# Altium PCB PCB1.PcbDoc
Units mm, origin at the board's own origin, x right, y up, seen from the top; angles counter-clockwise.
Board outline 10 x 18 mm, 4 copper layers (Top Layer, Layer 1, Layer 2, Bottom Layer), stack 0.603 mm thick; 24 components, 17 nets, 88 pads, 24 vias.
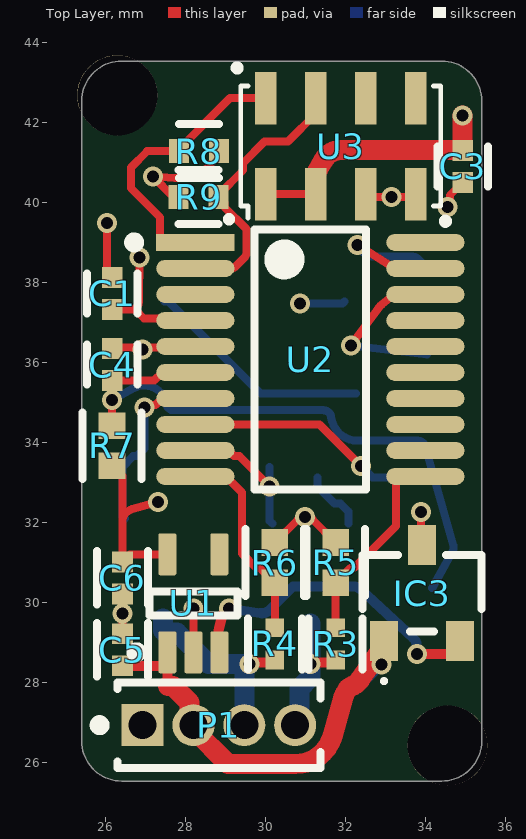
[diagram p0: Top Layer view]
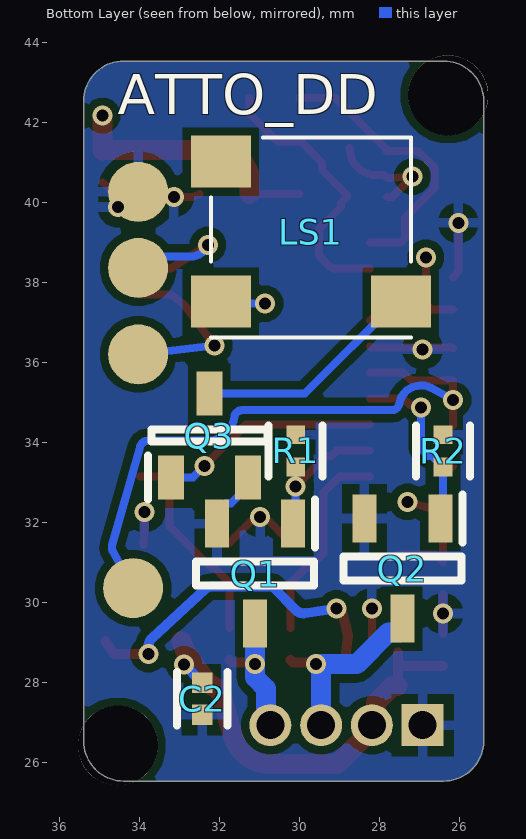
[diagram p1: Bottom Layer view, seen from below]
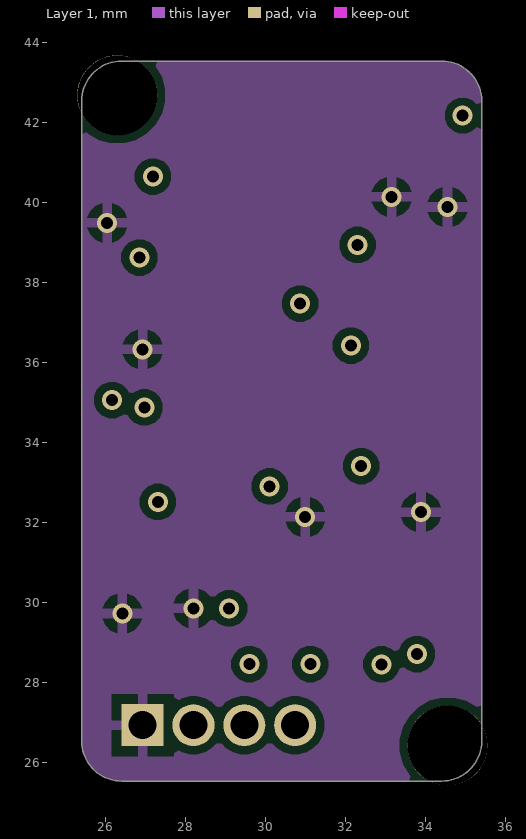
[diagram p2: Layer 1]
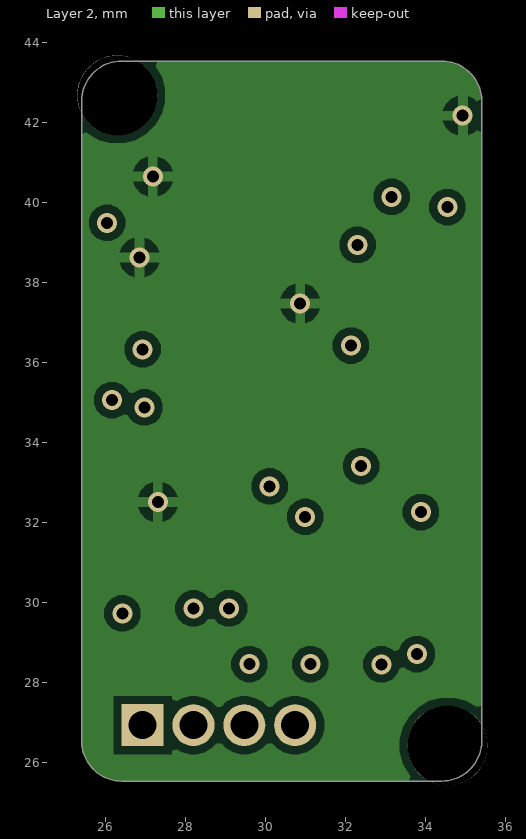
[diagram p3: Layer 2]
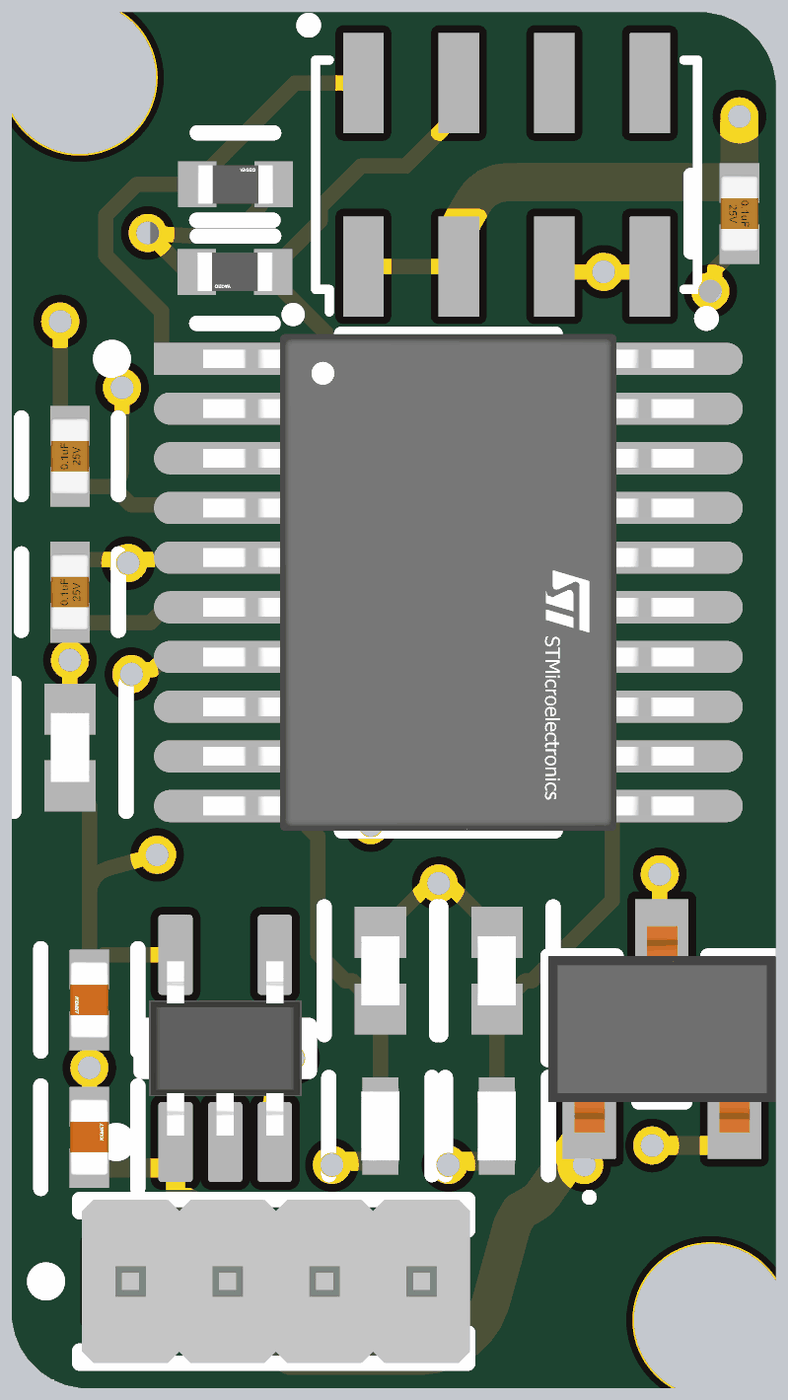
[diagram p4: 3D render of the assembled board from above, using the file's embedded part models]
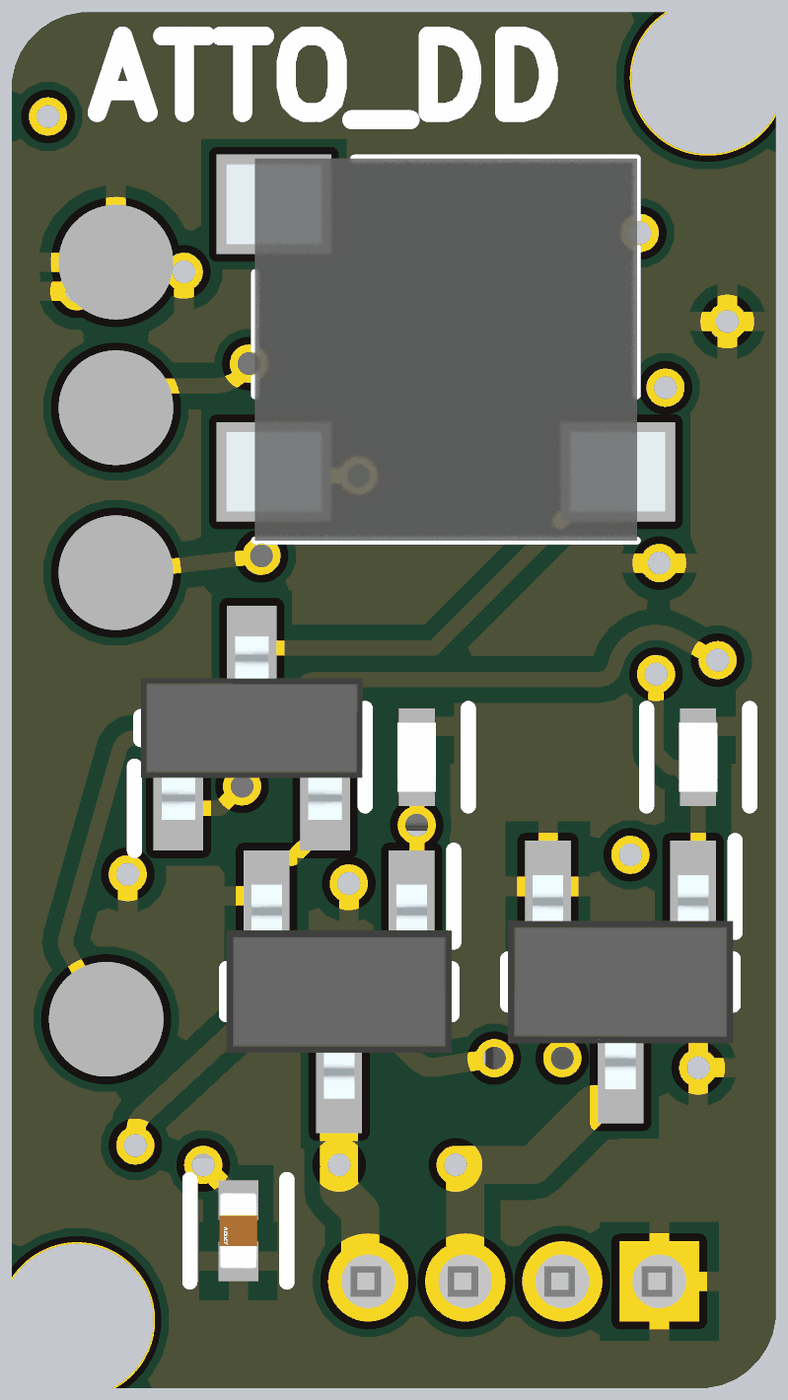
[diagram p5: 3D render of the assembled board from below, using the file's embedded part models]

## Layer stack, top to bottom
Top Solder: solder mask 0.0102, Solder Resist, Dk 3.5
Top Layer: signal copper 0.0356
Dielectric 2: prepreg 0.0711, PP-006, Dk 4.1
Layer 1: signal copper 0.035
Dielectric 1: dielectric 0.32, FR-4, Dk 4.8
Layer 2: signal copper 0.035
Dielectric 3: prepreg 0.0711, PP-006, Dk 4.1
Bottom Layer: signal copper 0.0356
Bottom Solder: solder mask 0.0102, Solder Resist, Dk 3.5

## Board outline
25.4,26.527 25.4,42.527 cw(c26.4,42.527) 26.4,43.527 34.4,43.527 cw(c34.4,42.527) 35.4,42.527 35.4,26.527 cw(c34.4,26.527) 34.4,25.527 26.4,25.527 cw(c26.4,26.527)

## Design rules (kind name [scope] priority, off if disabled: settings)
Clearance Clearance_1 [InNamedPolygon('GND_L01_P000')] p1: gap=0.254 ignorepadtopadclearanceinfootprint=FALSE
Clearance [All] p2: gap=0.2 ignorepadtopadclearanceinfootprint=TRUE
PolygonConnect PolygonConnect_2 [All vs IsNamedPolygon('GND_L01_P000')] p1: connectstyle=Relief reliefconductorwidth=0.254 reliefentries=4 polygonreliefangle="90 Angle" airgapwidth=0.254
PolygonConnect PolygonConnect_1 [All vs IsNamedPolygon('GND_L01_P000')] p2: connectstyle=Relief reliefconductorwidth=0.254 reliefentries=4 polygonreliefangle="90 Angle" airgapwidth=0.254
PolygonConnect [All] p3: connectstyle=Relief reliefconductorwidth=0.254 reliefentries=4 polygonreliefangle="90 Angle" airgapwidth=0.254
RoutingVias [All] p1: holewidth=0.3 width=0.5 viastyle="Through Hole" minholewidth=0.3 minwidth=0.5 maxholewidth=0.3 maxwidth=0.5
SolderMaskExpansion [All] p1: expansion=0.102 istentingtop=FALSE
SupplyNets "Schematic Supply Nets_2" [InNet('VBAT')] p1: voltage=0.000
SupplyNets "Schematic Supply Nets_1" [InNet('3v3')] p2: voltage=0.000
SupplyNets "Schematic Supply Nets" [InNet('GND')] p3: voltage=0.000
Width [All] p1: maxlimit=1 minlimit=0.2 preferedwidth=0.254 toplayer_maxwidth=0.5 toplayer_prefwidth=0.2 midlayer1_minwidth=0.254 midlayer2_minwidth=0.254 bottomlayer_maxwidth=0.5 bottomlayer_prefwidth=0.2 minimp=50.000000 maximp=50.000000 favimp=50.000000
30 further rules are at their usual default settings.

## Components (designator, comment, footprint, x,y, rotation, side; value= is the part's Value field where it differs from the comment)
C1 "0.1uF" FP-C0402-BB-MFG 26.162,37.719 r90 top value="0.10 μF"
C2 "C0402C105K8PACTU" FP-C0402C105K8PACTU-MFG 32.433,27.587 r270 bottom
C3 "0.1uF" FP-C0402-BB-MFG 34.925,40.894 r270 top value="0.10 μF"
C4 "0.1uF" FP-C0402-BB-MFG 26.162,35.941 r90 top value="0.10 μF"
C5 "C0402C105K8PACTU" FP-C0402C105K8PACTU-MFG 26.416,28.81 r90 top
C6 "C0402C105K8PACTU" FP-C0402C105K8PACTU-MFG 26.416,30.607 r270 top
IC3 "A1220LLHLT-T" A3213ELHLTT 33.909,30.226 r0 top
LS1 "CMT-0525-75-SMT-TR" CMT052575SMTTR 29.718,39.116 r180 bottom
P1 "GRPB041VWVN-RC" SLIN-GRPB041VWVN-RC_V 28.829,26.924 r0 top
Q1 "AO3400A" SOT95P280X125-3N 31.115,30.714 r270 bottom
Q2 "AO3400A" SOT95P280X125-3N 27.432,30.841 r270 bottom
Q3 "DDTD113ZC-7-F" SOT96P240X110-3N 32.258,34.163 r90 bottom
R1 "CRCW0402100KFKED" FP-CRCW0402-e3-IPC_C 30.099,33.782 r270 bottom
R2 "CRCW0402100KFKED" FP-CRCW0402-e3-IPC_C 26.416,33.782 r270 bottom
R3 "CRCW0402100KFKED" FP-CRCW0402-e3-IPC_C 31.75,28.956 r270 top
R4 "CRCW0402100KFKED" FP-CRCW0402-e3-IPC_C 30.226,28.956 r270 top
R5 "CRCW040250K0FKED" FP-CRCW0402-e3-IPC_A 31.75,30.988 r270 top
R6 "CRCW040250K0FKED" FP-CRCW0402-e3-IPC_A 30.226,30.988 r270 top
R7 "CRCW040250K0FKED" FP-CRCW0402-e3-IPC_A 26.162,33.909 r270 top
R8 "RC0402JR-074K7L" FP-RC0402-0_4-MFG 28.329,41.275 r0 top
R9 "RC0402JR-074K7L" FP-RC0402-0_4-MFG 28.321,40.132 r180 top
U1 "TLV70033DCKR" DCK0005A_M 28.194,29.972 r90 top
U2 "STM32G030F6P6TR" FP-TSSOP20-YA-IPC_A 31.115,36.068 r0 top
U3 "MS560702BA03-50" MS5607 31.877,41.402 r0 top

## Footprints (in the part's own frame and the unit in brackets; to place one, negate y for a bottom-side part, rotate by r counter-clockwise, add the part's x,y. Pads: shape width x height; smd on the part's side, far side on the other; paste and mask are expansions set on the pad)
A3213ELHLTT [mm]
  rect 0.7x1 smd: 1(-0.95,-1.2) 2(0.95,-1.2) 3(0,1.2)
  silkscreen extent -1.49,-2.25 1.49,0.95, body extent -1.48,-1.35 1.49,1.35, height 1.06
CMT052575SMTTR [mm]
  rect 1.5x1.3 smd: 1(-2.25,-1.6) 2(2.25,-1.6) 3(-2.25,1.9)
  silkscreen extent -2.5,-2.5 2.5,2.5, body extent -2.87,-2.5 2.87,2.5, height 2.9
DCK0005A_M [mm] "SOT23, 5-Leads, Body 2.15x1.4mm, Pitch 0.65mm, IPC Low Density"
  rrect22% 1.05x0.45 smd: 1(-1.225,0.65) 2(-1.225,0) 3(-1.225,-0.65) 4(1.225,-0.65) 5(1.225,0.65)
  silkscreen extent -1.35,-1.1 0.3,1.55, body extent -1.14,-1 1.14,1, height 0.94
FP-C0402-BB-MFG [mm]
  rect 0.52x0.52 smd paste+0 mask+0: 1(-0.4,0) 2(0.4,0)
  silkscreen extent -0.5,-0.64 0.5,0.64, body extent -0.8,-0.4 0.8,0.4, height 0.25
FP-C0402C105K8PACTU-MFG [mm]
  rect 0.52x0.52 smd paste+0 mask+0: 1(-0.4,0) 2(0.4,0)
  silkscreen extent -0.67,-0.64 0.67,0.64, body extent -0.5,-0.25 0.5,0.25, height 0.55
FP-CRCW0402-e3-IPC_A [mm]
  rect 0.668x0.672 smd paste+0 mask+0: 1(-0.502,0) 2(0.502,0)
  silkscreen extent -0.84,-0.74 0.84,0.74, body extent -1.04,-0.54 1.04,0.54, height 0.25
FP-CRCW0402-e3-IPC_C [mm]
  rect 0.468x0.472 smd paste+0 mask+0: 1(-0.402,0) 2(0.402,0)
  silkscreen extent -0.64,-0.67 0.64,0.67, body extent -0.5,-0.25 0.5,0.25, height 0.4
FP-RC0402-0_4-MFG [mm]
  rect 0.5x0.6 smd paste+0 mask+0: 1(-0.5,0) 2(0.5,0)
  silkscreen extent -0.5,-0.67 0.5,0.67, body extent -0.85,-0.4 0.85,0.4, height 0.25
FP-TSSOP20-YA-IPC_A [mm]
  rect 1.955x0.421 smd paste+0 mask+0: 1(-2.875,2.925)
  rrect100% 1.955x0.421 smd paste+0 mask+0: 2(-2.875,2.275) 3(-2.875,1.625) 4(-2.875,0.975) 5(-2.875,0.325) 6(-2.875,-0.325) 7(-2.875,-0.975) 8(-2.875,-1.625) 9(-2.875,-2.275) 10(-2.875,-2.925) 11(2.875,-2.925) 12(2.875,-2.275) 13(2.875,-1.625) 14(2.875,-0.975) 15(2.875,-0.325) 16(2.875,0.325) 17(2.875,0.975) 18(2.875,1.625) 19(2.875,2.275) 20(2.875,2.925)
  silkscreen extent -4.53,-3.25 1.4,3.25, body extent -4.35,-3.75 4.35,3.75, height 0.25
MS5607 [mm] "Small Outline No-Lead (SON), 1.25 mm pitch; 8 pin, 5.00 mm L X 3.00 mm W X 0.95 mm H body"
  rect 0.53x1.31 smd: 1(-1.875,-1.2) 2(-0.625,-1.2) 3(0.625,-1.2) 4(1.875,-1.2) 5(1.875,1.2) 6(0.625,1.2) 7(-0.625,1.2) 8(-1.875,1.2)
  silkscreen extent -2.82,-1.92 2.65,1.99, body extent -2.54,-1.52 2.54,1.52, height 0.95
SLIN-GRPB041VWVN-RC_V [mm] "Header, 4-Leads, Body 5.08x2.14mm, Pitch 1.27mm"
  rect 1.05x1.05 hole 0.7: 1(-1.905,0)
  round 1.05 hole 0.7: 2(-0.635,0) 3(0.635,0) 4(1.905,0)
  silkscreen extent -3.1,-1.07 2.54,1.07, body extent -2.54,-1.07 2.54,1.07, height 4
SOT95P280X125-3N [mm]
  rect 1.2x0.6 smd: 1(-1.25,0.95) 2(-1.25,-0.95) 3(1.25,0)
  silkscreen extent -1.85,-1.48 0.3,1.5, body extent -1.4,-1.48 1.4,1.48, height 1.25
SOT96P240X110-3N [mm]
  rect 1.1x0.65 smd: 1(-1.05,0.96) 2(-1.05,-0.96) 3(1.05,0)
  silkscreen extent -1.6,-1.45 0.15,1.54, body extent -1.2,-1.45 1.2,1.45, height 1.1

## Part data
C1 C3 C4: library part CMP-2008-02046-2, "CAP CER 0.1UF 10V X5R 0402", Capacitance="0.10 μF", Manufacturer=Kemet, Manufacturer Part Number=C0402C104K8PACTU, Package=C0402-BB, Temperature="-55°C to +125°C", Temperature Characteristic=X5R, Temperature Coefficient=15%, Temperature Range High=+125°C, Temperature Range Low=-55°C, Tolerance=0.1, Voltage Rating="10 V", Automotive=No, Category=Cap, ComponentLink2Description=Datasheet, ComponentLink2URL=https://content.kemet.com/datasheets/KEM_C1002_X7R_SMD.pdf, Device Class L1="Passive Components", Device Class L2=Capacitors, Device Class L3="Ceramic Capacitors", Digikey Description="CAP CER 0.1UF 10V X5R 0402", Height=0.55mm, Ipc Land Pattern Name=CAPC10050X50, Lead Free=Yes, Material=Ceramic, Mouser Description="Capacitor 100 nF 10 VDC 0402", Octopart=https://octopart.com/c0402c104k8pactu-kemet-140039, RoHS=TRUE
C2 C5 C6: library part CMP-2008-02081-2, "CAP CER 1UF 10V X5R 0402", Capacitance=1uF, Case Code (Imperial)=0402, Case Code (Metric)=1005, Dielectric=X5R, Dielectric Material=Ceramic, Max Operating Temperature=85°C, Min Operating Temperature=-55°C, Package Quantity=1, Tolerance=10%, Voltage=10V, Case/Package=0402, Construction=Flat, Contact Plating=Tin, Depth=0.5mm, Dissipation Factor=5%, Height=0.5mm, Lead Free="Lead Free", Length=1mm, Mount="Surface Mount", Number of Pins=2, Packaging="Tape and Reel", Radiation Hardening=No, REACH SVHC="No SVHC", RoHS Compliant=Yes, Series=C, Termination=SMD/SMT, Thickness=0.022inch, Voltage Rating=10V, Voltage Rating (DC)=10V, Width=0.5mm
IC3: "Integrated Circuit", Manufacturer_Name="Allegro Microsystems", Arrow Part Number=A1220LLHLT-T, Arrow Price/Stock=https://www.arrow.com/en/products/a1220llhlt-t/allegro-microsystems, Datasheet Link=http://www.allegromicro.com/~/media/files/datasheets/a1220-1-2-3-datasheet.pdf, Height=1.13mm, Manufacturer_Part_Number=A1220LLHLT-T
LS1: "Loudspeaker or Buzzer", Manufacturer_Name="Same Sky", Datasheet Link=https://datasheet.datasheetarchive.com/originals/distributors/Datasheets_SAMA/202edec26f194914f30bb21e54dbec55.pdf, Height=2.8mm, Manufacturer_Part_Number=CMT-0525-75-SMT-TR
P1: library part CMP-2000-06373-1, "Male Header, Pitch 1.27 mm, 1 x 4 Position, Height 4 mm, Tail Length 2.3 mm, -40 to 105 degC, RoHS, Bulk", Manufacturer=Sullins, Package Description="Male Header, Pitch 1.27 mm, 1 x 4 Position, Height 4 mm, Tail Length 2.3 mm", Standard Package=1, Catalog Drawings=S9014ESeriesTop, Category=Connectors,Interconnects, Connector Type=Header,Unshrouded, Contact Finish=Gold, Contact Finish Thickness=Flash, Contact Mating Length="0.118\"(3.00mm)", Contact Type=MalePin, Datasheet URL=http://www.sullinscorp.com/drawings/71_GRPB___1VWVN-RC,_10957-C.pdf, Datasheet Version="Rev. C, 12/2008", Dynamic Catalog=GRPB, Family=RectangularConnectors-Headers,MalePins, Manufacturer URL=http://www.sullinscorp.com/, Mating Products="S9010E-04-ND / -CONNHEADER.050\"4POSR/APCB / S9008E-04-ND / -CONNHEADER.050\"4POSPCBGOLD / S9005E-04-ND / -CONNHEADER.050\"4POSSMDGOLD", Mounting Technology=ThroughHole, Mounting Type=ThroughHole, Number of Positions=4, Number of Positions Loaded=All, Number of Rows=1, Other Names=S9014E-04, Package Reference=GRPB041VWVN-RC, Packaging=Bulk, Pitch="0.050\"(1.27mm)", Termination=Solder
Q1 Q2: "MOSFET (N-Channel)", Manufacturer_Name="Alpha & Omega Semiconductors", Arrow Part Number=AO3400A, Arrow Price/Stock=https://www.arrow.com/en/products/ao3400a/alpha-and-omega-semiconductor?utm_currency=USD&region=nac, Datasheet Link=http://aosmd.com/res/data_sheets/AO3400A.pdf, Height=1.25mm, Manufacturer_Part_Number=AO3400A
Q3: "Transistor BJT NPN", Manufacturer_Name="Diodes Incorporated", Arrow Part Number=DDTD113ZC-7-F, Arrow Price/Stock=https://www.arrow.com/en/products/ddtd113zc-7-f/diodes-incorporated, Datasheet Link=https://www.diodes.com//assets/Datasheets/DDTD_XXXX_C.pdf, Height=1.1mm, Manufacturer_Part_Number=DDTD113ZC-7-F
R1 R2 R3 R4: library part CMP-2002-08123-3, "RES Thick Film, 100kΩ, 1%, 0.063W, 100ppm/°C, 0402", Case Code (Imperial)=0402, Case Code (Metric)=1005, Max Operating Temperature=155°C, Max Power Dissipation=63mW, Min Operating Temperature=-55°C, Package Quantity=10000, Resistance=100kR, Temperature Coefficient=100ppm/°C, Tolerance=1%, Voltage Rating=50V, Case/Package=0402, Composition="Thick Film", Contact Plating=Tin, Depth=0.5mm, Features="Automotive AEC-Q200", Height=0.35mm, Lead Free="Lead Free", Length=1mm, Military Standard=Not, Mount="Surface Mount", Number of Pins=2, Number of Terminations=2, Packaging="Tape and Reel", Power Rating=63mW, Radiation Hardening=No, Termination=SMD/SMT, Voltage Rating (DC)=50V, Weight=2.3E-05oz, Width=0.02inch
R5 R6 R7: library part CMP-02407-005152-1, "RES Thick Film, 50kΩ, 1%, 0.063W, 100ppm/°C, 0402", Case Code (Imperial)=0402, Case Code (Metric)=1005, Max Operating Temperature=155°C, Min Operating Temperature=-55°C, Package Quantity=10000, Power Rating=63mW, Resistance=50kR, Tolerance=1%, Voltage Rating=50V, Case/Package=0402, Height=0.35mm, Lead Free="Lead Free", Length=1mm, Packaging="Tape and Reel", Termination=SMD/SMT, Weight=2.3E-05oz, Width=0.5mm
R8 R9: library part CMP-2002-08011-2, Case Code (Imperial)=0402, Max Operating Temperature=155°C, Max Power Dissipation=63mW, Min Operating Temperature=-55°C, Resistance=4.7kΩ, Temperature Coefficient=100ppm/°C, Tolerance=5%, Voltage Rating=50V, Case/Package=0402, Composition="Thick Film", Depth=500µm, Features="Moisture Resistant", Height=350µm, Lead Free="Lead Free", Length=1mm, Military Standard=Not, Number of Pins=2, Number of Terminations=2, Packaging="Tape & Reel", Power Rating=63mW, REACH SVHC="No SVHC", RoHS=Compliant, Schedule B="8533210045, 8533210045", Termination=SMD/SMT, Voltage Rating (AC)=50V, Voltage Rating (DC)=50V, Width=500µm
U1: library part CMP-0394-00820-2, "Single Output LDO, 200 mA, Fixed 3.3 V Output, 2 to 5.5 V Input, with Low IQ, 5-pin SC70 (DCK), -40 to 125 degC, Green (RoHS & no Sb/Br)", Manufacturer="Texas Instruments", Accuracy(%)=2, Code_JEDEC=MO-203, ComponentLink1Description="Manufacturer URL", ComponentLink1URL=http://www.ti.com/, ComponentLink2Description=Datasheet, ComponentLink2URL=http://www.ti.com/general/docs/lit/getliterature.tsp?genericPartNumber=TLV70033&fileType=pdf, ComponentLink3Description="Package Specification", ComponentLink3URL=http://www.ti.com/litv/pdf/mpds025f, DatasheetVersion=SLVSA00D, Eco-Plan="Green (RoHS & no Sb/Br)", Fixed Output Options(V)=3.3, Iout(Max)(A)=0.2, Iq(Typ)(mA)=0.03, Mounting Technology="Surface Mount", PackageDescription="5-Pin Plastic Small-Outline, Body 2 x 1.25 mm, Pitch 0.65 mm", PackageReference=DCK0005A, PackageVersion=4093553-3/G, PartNumber=TLV70033DCKR, SubFamily="Single Channel LDO", Vdo(Typ)(mV)=175, Vin(Max)(V)=5.5, Vin(Min)(V)=2, Vout Adj(Max)(V)=3.3, Vout Adj(Min)(V)=3.3
U2: library part CMP-12105-000113-1, "IC MCU 32BIT 32KB FLASH 20TSSOP", RoHS Compliant=Yes
U3: library part CMP-040-000016-3, "Barometric Pressure Sensor I2C/SPI", Supplier Part Number 1=223-1198-1-ND, Design Item ID=MS560702BA03-50, Reviewed By="Adam Rising", Source=Sensors.SchLib, Supplier 1=Digi-Key

## Free pads (board coordinates)
  round 2 hole 2: 47(26.289,42.672) 48(34.544,26.416)
  round 1.5 smd far side: 49(34.036,36.195) 49(34.036,38.354) 49(34.036,40.259) 49(34.163,30.353)

## Via types
v1: diameter 0.5, hole 0.3, Top Layer to Bottom Layer, 24 vias

## Nets (pads, with @x,y where several pads share a name; then routed paths per layer and width w, separated by ;. In a path a pad name is that pad's centre, name@x,y a point inside that pad or via, vN(x,y) a via of type N, cw(c..) or ccw(c..) an arc to the next point about the centre after c; other vN are vias at no path point)
3v3: C1.1 C3.1 C6.1 LS1.1 R7.2 R8.2 R9.2 U1.5 U2.4 U3.1 U3.2 | length 18.9
  Top Layer w0.2: R7.2 26.164,33.407 26.398,33.173 26.398,33.171 26.416,33.153 26.416,32.004 ; C1.1 26.729,37.319 ; v1(26.844,38.616) 26.835,37.53 cw(c26.635,37.532) 26.798,37.417 26.729,37.319 ; v1(27.303,32.505) 26.662,32.327 ccw(c26.752,32.004) 26.416,32.004 ; U1.5 26.606,31.197 C6.1 26.416,31.167 26.416,31.586 26.416,32.004 ; R9.2 27.688,40.132 v1(27.18,40.64) 27.728,40.603 ccw(c27.74,40.802) 27.894,40.675 28.079,40.675 28.081,40.675 ccw(c28.079,41.355) 28.699,41.075 R8.2@28.759,41.355 ; U2.4 28.197,37.085 26.963,37.085 26.729,37.319 ; U3.1 30.167,40.202 31.087,40.202 U3.2
  Top Layer w0.5: U3.2 31.253,40.607 cw(c31.752,40.583) 31.32,40.835 31.449,41.056 cw(c31.881,40.804) 31.877,41.304 32.233,41.307 cw(c32.237,40.857) 32.235,41.307 34.017,41.307 cw(c34.017,40.857) 34.02,41.307 34.421,41.304 34.915,41.304 C3.1 v1(34.925,42.164)
  Bottom Layer w0.2: v1(30.861,37.465) 31.917,37.465 LS1.1
BUZ: Q3.1 U2.8 | length 5.5
  Top Layer w0.2: U2.8 31.343,34.443 v1(32.385,33.401)
  Bottom Layer w0.2: v1(32.385,33.401) 32.673,33.113 Q3.1
EN: IC3.2 U1.3 | length 8.2
  Top Layer w0.25: U1.3 28.791,29.147 28.828,29.331 cw(c29.073,29.282) 28.83,29.343 28.907,29.65 cw(c29.15,29.589) 29.01,29.797 v1(29.083,29.845) ; v1(33.782,28.702) 34.634,28.702 IC3.2
  Bottom Layer w0.25: v1(29.083,29.845) 29.871,29.723 ccw(c29.908,29.971) 30.085,29.794 30.68,30.389 32.196,30.389 cw(c32.196,30.139) 32.365,30.323 33.693,29.097 cw(c33.523,28.913) 33.773,28.923 v1(33.782,28.702)
GND: C1.2 C2.2 C3.2 C4.2 C5.2 C6.2 IC3.3 P1.1 pad.49@34.036,40.259 Q1.2 Q2.2 Q3.2 R1.1 R2.1 R5.1 R6.1 U1.2 U2.5 U3.3 U3.4 | length 12.1
  Top Layer w0.2: v1(26.035,39.482) 26.035,38.279 C1.2 ; C4.2 26.188,36.367 28.214,36.367 U2.5 ; C5.2 v1(26.416,29.718) C6.2 ; U1.2 v1(28.194,29.845) ; R6.1 30.228,31.49 30.812,32.074 30.931,32.074 v1(30.988,32.131) 31.045,32.074 31.164,32.074 31.748,31.49 R5.1 ; U3.3 32.667,40.132 33.587,40.132 U3.4 ; v1(33.882,32.25) 33.882,31.826 IC3.3 ; v1(34.544,39.878) 34.601,39.935 34.601,40.17 C3.2
  Bottom Layer w0.2: Q3.2 31.298,32.888 31.722,32.464 31.865,32.464 32.065,32.264 Q1.2
  other v1: 26.924,36.322 33.147,40.132
NetLS1_2: LS1.2 Q3.3 | length 5.7
  Bottom Layer w0.2: LS1.2 27.568,37.516 29.871,35.213 Q3.3
NRST: C4.1 pad.49@34.163,30.353 R7.1 U2.6 | length 15.7
  Top Layer w0.2: R7.1 v1(26.162,35.052) C4.1 27.211,35.541 27.413,35.743 U2.6
  Bottom Layer w0.2: v1(26.162,35.052) 26.701,35.35 cw(c26.967,34.869) 27.509,34.963 ccw(c27.706,34.998) 27.706,34.798 31.438,34.798 cw(c31.437,34.598) 31.635,34.625 ccw(c32.305,34.711) 32.305,34.036 33.794,34.036 cw(c33.794,33.836) 33.986,33.891 34.69,31.42 cw(c34.498,31.365) 34.672,31.268 pad.49@34.163,30.353
P1: P1.3 Q2.3 R4.2 | length 5.1
  Top Layer w0.25: v1(29.591,28.448) 29.639,28.496 30.168,28.496 R4.2
  Bottom Layer w0.5: Q2.3 27.432,29.291 27.482,29.241 27.782,29.241 28.575,28.448 v1(29.591,28.448) 29.464,28.321 P1.3
P1C: R4.1 R6.2 U2.10 | length 5.1
  Top Layer w0.2: U2.10 29.007,33.143 29.407,32.743 29.407,31.214 29.766,30.856 29.854,30.856 30.224,30.486 R6.2 R4.1
P1I: Q2.1 R2.2 U2.7 | length 4.5
  Top Layer w0.2: v1(26.967,34.869) 27.025,34.926 27.245,34.926 27.413,35.093 U2.7
  Bottom Layer w0.2: Q2.1 26.416,32.157 R2.2 26.418,33.38 26.688,33.65 26.776,33.65 26.967,33.841 v1(26.967,34.869)
P2: P1.4 Q1.3 R3.2 | length 3.4
  Top Layer w0.25: v1(31.115,28.448) 31.163,28.496 31.692,28.496 R3.2
  Bottom Layer w0.5: P1.4 30.839,27.029 30.839,27.838 31.115,28.114 v1(31.115,28.448) Q1.3
P2C: R3.1 R5.2 U2.11 | length 5.1
  Top Layer w0.2: R3.1 R5.2 31.752,30.486 32.122,30.856 32.21,30.856 33.259,31.905 33.259,33.041 33.361,33.143 U2.11
P2I: Q1.1 R1.2 U2.9 | length 3.7
  Top Layer w0.2: U2.9 29.066,33.793 29.206,33.653 29.339,33.653 v1(30.099,32.893)
  Bottom Layer w0.2: R1.2 v1(30.099,32.893) 30.099,32.03 Q1.1
SCL: R8.1 U2.1 U3.8 | length 7.1
  Top Layer w0.2: U2.1 27.472,38.993 27.362,39.103 27.362,39.617 26.63,40.349 26.63,40.868 27.037,41.275 R8.1 27.829,41.325 29.106,42.602 U3.8
SDA: R9.1 U2.2 U3.7 | length 7
  Top Layer w0.2: U2.2 29.119,38.343 ccw(c29.119,38.543) 29.26,38.401 29.459,38.6 ccw(c29.317,38.741) 29.517,38.741 29.517,39.328 28.971,39.874 28.971,39.982 R9.1 28.821,40.182 29.437,40.798 29.437,40.981 29.97,41.514 30.554,41.514 31.252,42.212 U3.7
SWCLK: pad.49@34.036,38.354 U2.19 | length 3.8
  Top Layer w0.2: v1(32.295,38.931) 33.223,38.343 U2.19
  Bottom Layer w0.2: v1(32.295,38.931) ccw(c32.743,39.124) 32.742,38.637 33.671,38.637 cw(c33.67,38.437) 33.812,38.578 pad.49@34.036,38.354
SWDIO: pad.49@34.036,36.195 U2.18 | length 4.4
  Top Layer w0.2: v1(32.131,36.416) 32.812,37.345 cw(c33.223,37.043) 32.907,37.444 33.223,37.693 U2.18
  Bottom Layer w0.2: v1(32.131,36.416) pad.49@34.036,36.195
VBAT: C2.1 C5.1 IC3.1 P1.2 U1.1 | length 11
  Top Layer w0.25: C5.1 27.444,28.41 U1.1@27.544,28.51 ; U1.1 U1.1@27.544,28.51 ; 27.559,27.899 27.544,27.914 U1.1@27.544,28.51
  Top Layer w0.5: 27.559,27.899 27.685,27.899 28.089,27.495 28.089,27.029 P1.2 28.194,26.815 29.06,25.949 30.734,25.949 ccw(c30.734,26.924) 31.664,26.632 ccw(c30.734,26.924) 31.674,26.663 31.935,27.607 cw(c32.417,27.473) 31.982,27.72 32.052,27.842 32.173,27.91 cw(c32.417,27.473) 32.189,27.918 ccw(c31.986,28.32) 32.354,28.06 ; 32.354,28.06 32.859,28.776 IC3.1
  Bottom Layer w0.25: C2.1 v1(32.893,28.447)
pads on no net: LS1.3 U1.4 U2.3 U2.12 U2.13 U2.14 U2.15 U2.16 U2.17 U2.20 U3.5 U3.6

## Polygon pours and split planes (outlines as drawn)
GND on Layer 1 "GND_L02_P002" (solid, remove dead copper, pour order 2): 25.4,26.527 25.4,42.527 cw(c26.4,42.527) 26.4,43.527 34.4,43.527 cw(c34.4,42.527) 35.4,42.527 35.4,26.527 cw(c34.4,26.527) 34.4,25.527 26.4,25.527 cw(c26.4,26.527)
3v3 on Layer 2 "3V3_L03_P003" (solid, remove dead copper, pour order 3): 25.4,26.527 25.4,42.527 cw(c26.4,42.527) 26.4,43.527 34.4,43.527 cw(c34.4,42.527) 35.4,42.527 35.4,26.527 cw(c34.4,26.527) 34.4,25.527 26.4,25.527 cw(c26.4,26.527)
GND on Bottom Layer "GND_L04_P004" (solid, remove dead copper, pour order 4): 25.4,26.527 25.4,42.527 cw(c26.4,42.527) 26.4,43.527 34.4,43.527 cw(c34.4,42.527) 35.4,42.527 35.4,26.527 cw(c34.4,26.527) 34.4,25.527 26.4,25.527 cw(c26.4,26.527)

## Silkscreen, mask and mechanical layers (free items; w line width, h text height)
Bottom Overlay:
  text "ATTO_DD" at 34.544,42.204 h1